# Altium PCB OSSI-1 Side Panel.PcbDoc
Units mil, origin at the board's own origin, x right, y up, seen from the top; angles counter-clockwise.
Board outline 3229 x 4312 mil, 2 copper layers (Top, Bottom), stack 61.811 mil thick; 52 components, 37 nets, 113 pads, 26 vias.
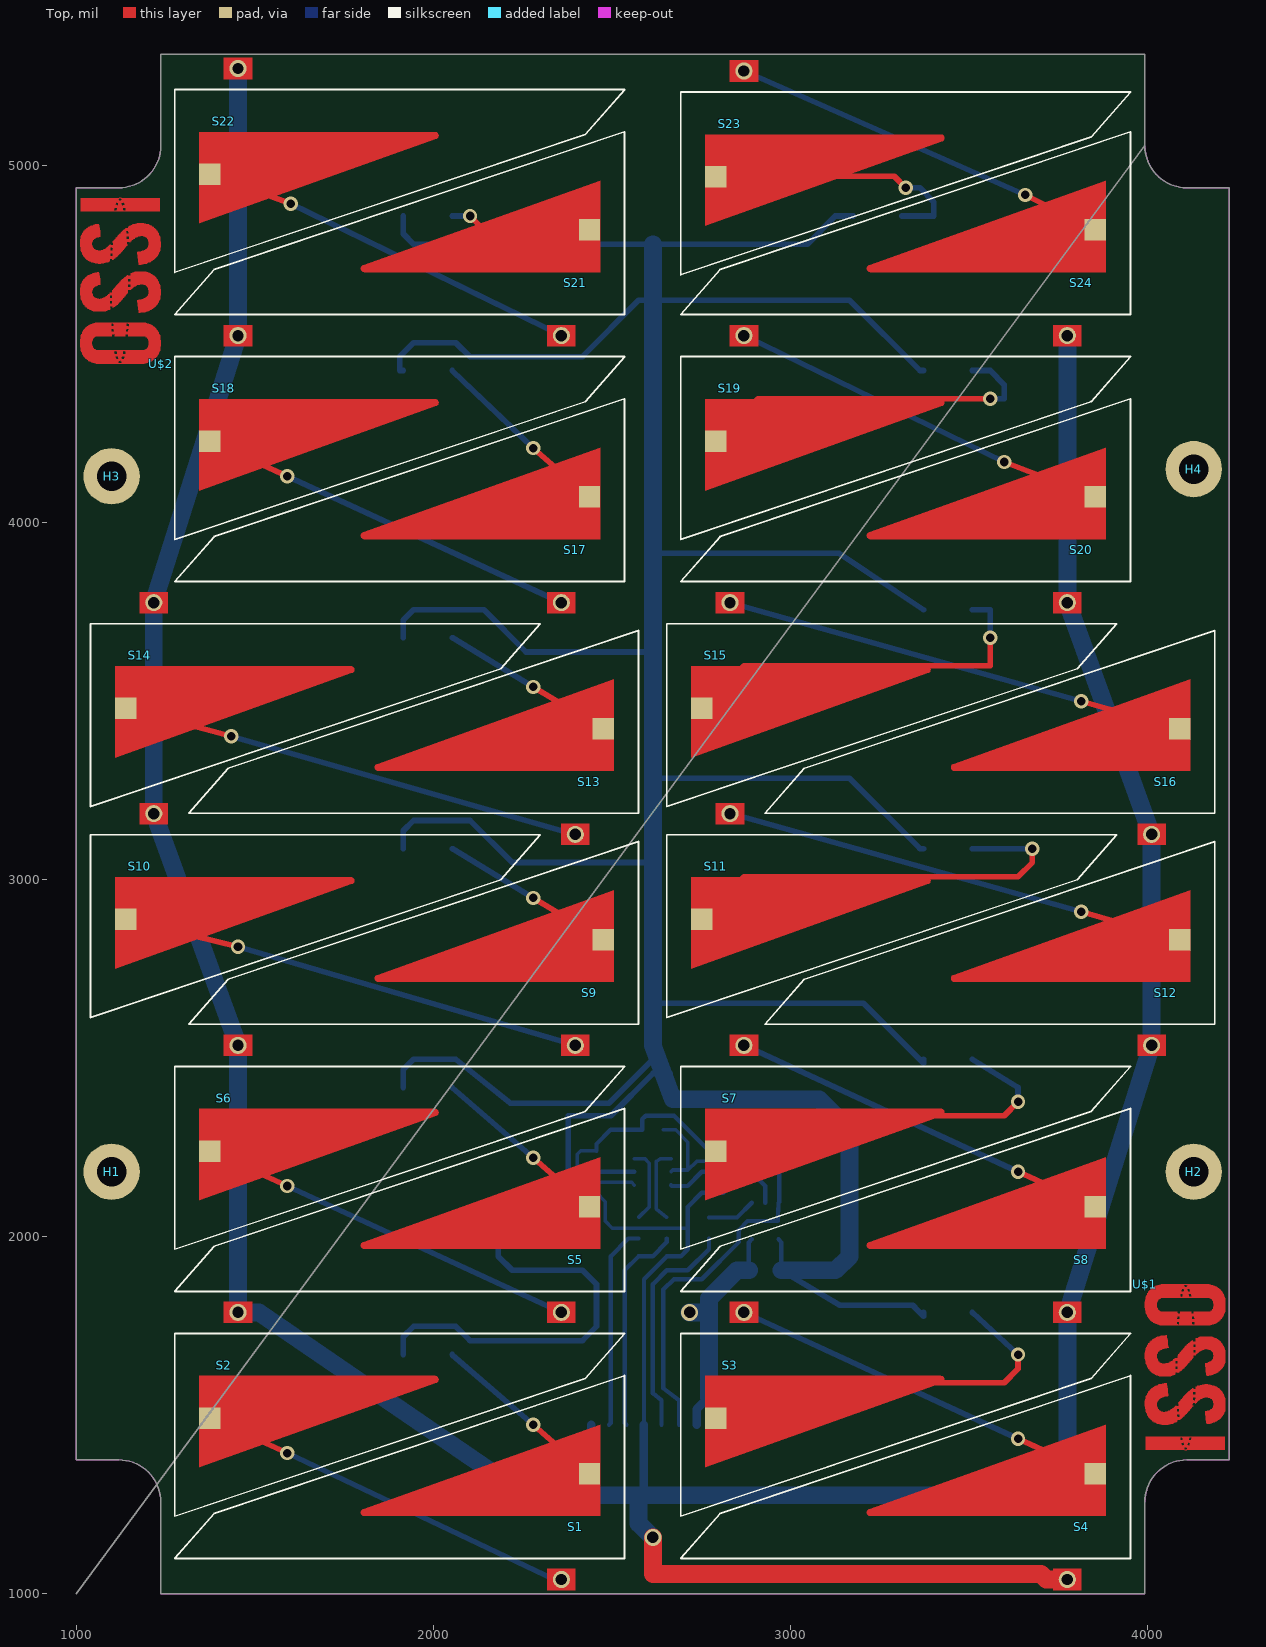
[diagram p0: Top view]
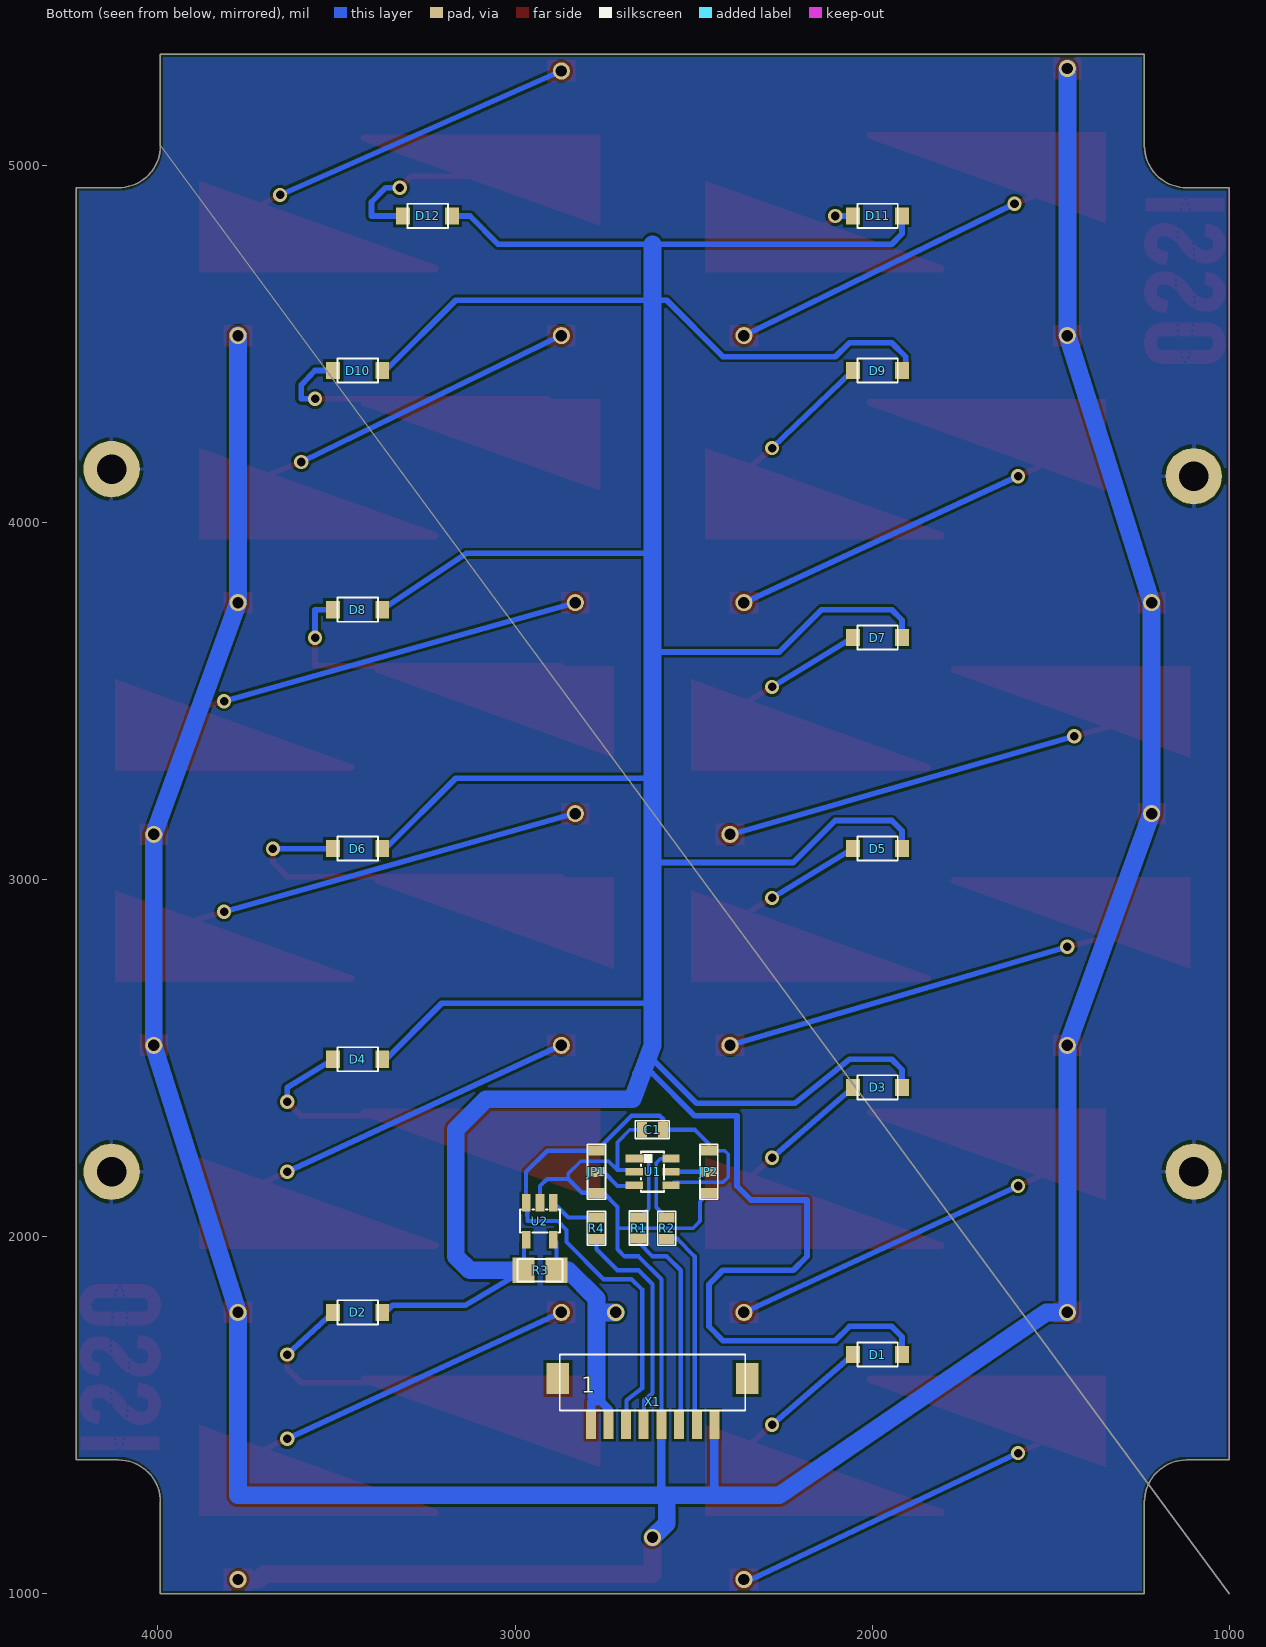
[diagram p1: Bottom view, seen from below]

## Layer stack, top to bottom
Top Solder: solder mask 0.4, Solder Resist, Dk 3.5
Top: signal copper 1.378
Dielectric 1: core 59.0551, FR-4, Dk 4.8
Bottom: signal copper 1.378
Bottom Solder: solder mask 0.4, Solder Resist, Dk 3.5

## Board outline
3993,5056 3993,5312 1237,5312 1237,5056 cw(c1119,5056) 1119,4938 1000,4938 1000,1375 1119,1375 cw(c1118.5,1256.5) 1237,1256 1237,1000 3993,1000 3993,1256 cw(c4111.5,1256.5) 4111,1375 4229,1375 4229,4938 4111,4938 cw(c4111,5056) 1000,1000

## Design rules (kind name [scope] priority, off if disabled: settings)
Clearance mdViaVia [IsVia vs IsVia] p1: gap=8
Clearance mdPadVia [IsPad vs IsVia] p2: gap=8
Clearance mdPadPad [IsPad vs IsPad] p3: gap=8
Clearance mdWireVia [(InLayerClass('Signal Layers') AND IsTrack) vs IsVia] p4: gap=8
Clearance mdWirePad [(InLayerClass('Signal Layers') AND IsTrack) vs IsPad] p5: gap=8
Clearance mdWireWire [(InLayerClass('Signal Layers') AND IsTrack) vs (InLayerClass('Signal Layers') AND IsTrack)] p6: gap=8
Clearance [All] p7: gap=8
HoleSize [All] p1: absolutevalues=TRUE maxlimit=100000 minlimit=24 maxpercent=80.000 minpercent=20.000
HoleToHoleClearance [All] p1: gap=8 allowstackedmicrovias=TRUE
PolygonConnect ThermalVias [IsVia] p1: connectstyle=Direct reliefconductorwidth=10 reliefentries=4 polygonreliefangle="90 Angle" airgapwidth=10
PolygonConnect [All] p2: connectstyle=Relief reliefconductorwidth=10 reliefentries=4 polygonreliefangle="90 Angle" airgapwidth=10
RoutingVias [All] p1: holewidth=28 width=50 viastyle="Through Hole" minholewidth=28 minwidth=50 maxholewidth=28 maxwidth=50
SilkToSilkClearance [All] p1 off: silktosilkclearance=10
SilkToSolderMaskClearance [IsPad] p1 off: minsilkscreentomaskgap=10 clearancetoexposedcopper=TRUE
SolderMaskExpansion [All] p1: expansion=4
Width [All] p1: maxlimit=100000 minlimit=10 preferedwidth=10
26 further rules are at their usual default settings.

## Components (designator, comment, footprint, x,y, rotation, side; value= is the part's Value field where it differs from the comment)
C1 "100nF" C0603(1608) 2615,2300 r0 bottom
D1 "STPS0520Z" SOD-123 1985,1670 r180 bottom
D2 "STPS0520Z" SOD-123 3441,1788 r180 bottom
D3 "STPS0520Z" SOD-123 1985,2418 r180 bottom
D4 "STPS0520Z" SOD-123 3441,2497 r180 bottom
D5 "STPS0520Z" SOD-123 1985,3087 r180 bottom
D6 "STPS0520Z" SOD-123 3441,3087 r180 bottom
D7 "STPS0520Z" SOD-123 1985,3678 r180 bottom
D8 "STPS0520Z" SOD-123 3441,3756 r180 bottom
D9 "STPS0520Z" SOD-123 1985,4426 r180 bottom
D10 "STPS0520Z" SOD-123 3441,4426 r180 bottom
D11 "STPS0520Z" SOD-123 1985,4859 r180 bottom
D12 "STPS0520Z" SOD-123 3245,4859 r180 bottom
H1 "" 2.1-PAD-ROUND 1099,2182 r0 top
H2 "" 2.1-PAD-ROUND 4130,2182 r0 top
H3 "" 2.1-PAD-ROUND 1099,4130 r0 top
H4 "" 2.1-PAD-ROUND 4130,4150 r0 top
JP1 "" JP2SMD0603 2772,2182 r270 bottom
JP2 "" JP2SMD0603 2457,2182 r90 bottom
R1 "250" R0603(1608) 2654,2024 r90 bottom
R2 "250" R0603(1608) 2575,2024 r270 bottom
R3 "50m" WSL1206 2930,1906 r180 bottom
R4 "1k" R0603(1608) 2772,2024 r270 bottom
S1 "TASCSOLARCELL" TASCSOLARCELL 2536,1099 r0 top
S2 "TASCSOLARCELL" TASCSOLARCELL 1276,1729 r180 top
S3 "TASCSOLARCELL" TASCSOLARCELL 2693,1729 r180 top
S4 "TASCSOLARCELL" TASCSOLARCELL 3953,1099 r0 top
S5 "TASCSOLARCELL" TASCSOLARCELL 2536,1847 r0 top
S6 "TASCSOLARCELL" TASCSOLARCELL 1276,2477 r180 top
S7 "TASCSOLARCELL" TASCSOLARCELL 2693,2477 r180 top
S8 "TASCSOLARCELL" TASCSOLARCELL 3953,1847 r0 top
S9 "TASCSOLARCELL" TASCSOLARCELL 2575,2595 r0 top
S10 "TASCSOLARCELL" TASCSOLARCELL 1040,3126 r180 top
S11 "TASCSOLARCELL" TASCSOLARCELL 2654,3126 r180 top
S12 "TASCSOLARCELL" TASCSOLARCELL 4189,2595 r0 top
S13 "TASCSOLARCELL" TASCSOLARCELL 2575,3186 r0 top
S14 "TASCSOLARCELL" TASCSOLARCELL 1040,3717 r180 top
S15 "TASCSOLARCELL" TASCSOLARCELL 2654,3717 r180 top
S16 "TASCSOLARCELL" TASCSOLARCELL 4189,3186 r0 top
S17 "TASCSOLARCELL" TASCSOLARCELL 2536,3835 r0 top
S18 "TASCSOLARCELL" TASCSOLARCELL 1276,4465 r180 top
S19 "TASCSOLARCELL" TASCSOLARCELL 2693,4465 r180 top
S20 "TASCSOLARCELL" TASCSOLARCELL 3953,3835 r0 top
S21 "TASCSOLARCELL" TASCSOLARCELL 2536,4583 r0 top
S22 "TASCSOLARCELL" TASCSOLARCELL 1276,5213 r180 top
S23 "TASCSOLARCELL" TASCSOLARCELL 2693,5206 r180 top
S24 "TASCSOLARCELL" TASCSOLARCELL 3953,4583 r0 top
U1 "TMP100" SOT23-6DBV 2615,2182 r270 bottom
U2 "MAX4376" SOT23-5DBV 2930,2044 r0 bottom
U$1 "" OSSILOGORECT1005 3993,1867 r270 top
U$2 "" OSSILOGORECT1005 1237,4445 r90 top
X1 "DF13DF13A-8P-1.25H" DF13A-8P 2615,1473 r180 bottom

## Footprints (in the part's own frame and the unit in brackets; to place one, negate y for a bottom-side part, rotate by r counter-clockwise, add the part's x,y. Pads: shape width x height; smd on the part's side, far side on the other; paste and mask are expansions set on the pad)
2.1-PAD-ROUND [mil] "2.1-PAD-ROUND"
  round 158 hole 83: B3,2(0,0)
C0603(1608) [mil] "C0603(1608)"
  rect 28x44 smd: 1(-29.53,0) 2(30,0)
  silkscreen extent -47,-25 48,25
DF13A-8P [mil] "DF13A-8P"
  rect 28x79 smd: 1(-172.24,0) 2(-123.03,0) 3(-73.82,0) 4(-24.61,0) 5(25,0) 6(74,0) 7(124,0) 8(173,0)
  rect 63x87 smd: P$1(-264.76,130) P$2(265,130)
  silkscreen extent -260,40 260,197
JP2SMD0603 [mil] "JP2SMD0603"
  rect 28x44 smd: 1(-59.06,0) 2(0,0) 3(60,0)
  silkscreen extent -77,-25 77,25
OSSILOGORECT1005 [mil] "OSSILOGORECT1005"
  Top drawing of 1356 lines, arcs and shapes, not listed
R0603(1608) [mil] "R0603(1608)"
  rect 28x44 smd: 1(-29.53,0) 2(30,0)
  silkscreen extent -47,-25 48,25
SOD-123 [mil] "SOD-123"
  rect 39x48 smd: A(-68.31,0) C(69,0)
  silkscreen extent -56,-33 57,34
SOT23-5DBV [mil] "SOT23-5DBV"
  rect 24x49 smd: 1(-37.4,-51.18) 2(0,-51.18) 3(38,-51.18) 4(38,52) 5(-37.4,52)
  silkscreen extent -56,-32 56,32
SOT23-6DBV [mil] "SOT23-6DBV"
  rect 22x48 smd: 1(-37.4,-51.18) 2(0,-51.18) 3(38,-51.18) 4(38,52) 5(0,52) 6(-37.4,52)
  silkscreen extent -56,-32 56,32
TASCSOLARCELL [mil] "TASCSOLARCELL"
  round 48 hole 32: N(-177.17,-59.06)
  rect 60x60 smd: P(-98.43,237)
  Top region: -216.54,-88.58 -137.8,-88.58 -137.8,-29.53 -216.54,-29.53
  Top region: -68.9,119 -729.02,119 -733.43,120.03 -736.9,122.94 -738.7,127.1 -738.43,131.62 -736.15,135.53 -732.35,138 -732.35,138 -68.9,375
  silkscreen extent -1260,0 0,512
WSL1206 [mil] "WSL1206"
  rect 62x71 smd: P$1(-45.87,0) P$2(46,0)
  silkscreen extent -63,-31 63,32

## Part data
C1: library part C0603(1608)
D1 D2 D3 D4 D5 D6 D7 D8 D9 D10 D11 D12: library part SOD-123
H1 H2 H3 H4: library part 2.1-PAD-ROUND
JP1 JP2: library part JP2SMD0603
R1 R2 R4: library part R0603(1608)
R3: library part WSL1206
U1: library part SOT23-6DBV
U2: library part SOT23-5DBV
U$1 U$2: library part OSSILOGORECT1005
X1: library part DF13A-8P

## Via types
v1: diameter 40/40 (per signal layer), hole 24, Top to Bottom, 24 vias
v2: diameter 48/48 (per signal layer), hole 32, Top to Bottom, 2 vias

## Nets (pads, with @x,y where several pads share a name; then routed paths per layer and width w, separated by ;. In a path a pad name is that pad's centre, name@x,y a point inside that pad or via, vN(x,y) a via of type N, cw(c..) or ccw(c..) an arc to the next point about the centre after c; other vN are vias at no path point)
3.3VOBC: C1.1 JP1.1 JP2.3 U1.4 U2.3 X1.3 | length 1897.7
  Bottom w10: JP2.3@2457,2241 2413,2241 2403,2231 2403,2167 2418,2152 2556,2152 U1.4
  Bottom w12: JP2.3@2457,2241 2457,2260 2497,2300 2585,2300 2585,2329 2595,2339 2674,2339 2772,2241 2910,2241 2969,2182 2969,2097 2967,2095 2965,2044 2880,2044 2856,2019 2856,1985 2752,1881 2674,1881 2644,1852 2644,1576 2688,1542 X1.3@2688,1473
CS: R4.2 X1.4 | length 632.8
  Bottom w12: X1.4@2639,1473 2639,1542 2615,1562 2615,1867 2654,1906 2713,1906 2772,1965 R4.2@2772,1995
GND: C1.2 JP1.3 JP2.1 S2.N S4.N S6.N S8.N S10.N S12.N S14.N S16.N S18.N S20.N S22.N S24.N U1.2 U2.2 X1.5 X1.8 | length 12886
  Top w50: v2(2615,1158) 2615,1055 3702,1055 3717,1040 S4.N@3776,1040
  Bottom w10: JP2.1@2457,2123 2482,2098 2482,2044 2501,2024 2713,2024 ; C1.2@2644,2300 2679,2300 2713,2265 2713,2187 ; U1.2@2666,2182 2671,2187 2713,2187 ; 2851,2162 2851,2177 2816,2211 2738,2211 2713,2187
  Bottom w12: X1.5 2590,1517 2590,1881 2654,1945 2693,1945 2713,1965 2713,2024 2713,2083 2752,2123 2772,2123 2812,2123 2851,2162 2910,2162 2930,2142 U2.2@2930,2095
  Bottom w24: X1.8 2442,1291 2457,1276 ; 2575,1276 2590,1291 X1.5
  Bottom w50: S22.N@1453,5272 1453,4524 1217,3776 1217,3186 1453,2536 1453,1788 1512,1788 2260,1276 2457,1276 2575,1276 ; v2(2615,1158) 2575,1197 2575,1276 ; S24.N@3776,4524 3776,3776 4012,3126 4012,2536 3776,1788 3776,1276 2575,1276
N$1: S1.N S2.P | length 1085.1
  Top w16: S2.P@1375,1493 v1(1591,1394)
  Bottom w16: v1(1591,1394) 2339,1040 S1.N@2359,1040
N$2: D1.A S1.P | length 510.3
  Top w16: v1(2280,1473) S1.P@2438,1335
  Bottom w16: D1.A@2053,1670 v1(2280,1473)
N$3: S3.N S4.P | length 1083.3
  Top w16: v1(3638,1434) S4.P@3855,1335
  Bottom w16: S3.N@2871,1788 v1(3638,1434)
N$4: D2.A S3.P | length 1116.8
  Top w16: S3.P@2792,1493 2890,1591 3599,1591 3638,1630 v1(3638,1670)
  Bottom w16: D2.A@3510,1788 v1(3638,1670)
N$5: S5.N S6.P | length 1083.3
  Top w16: S6.P@1375,2241 v1(1591,2142)
  Bottom w16: v1(1591,2142) S5.N@2359,1788
N$6: D3.A S5.P | length 510.3
  Top w16: v1(2280,2221) S5.P@2438,2083
  Bottom w16: D3.A@2053,2418 v1(2280,2221)
N$7: S7.N S8.P | length 1083.3
  Top w16: v1(3638,2182) S8.P@3855,2083
  Bottom w16: S7.N@2871,2536 v1(3638,2182)
N$8: D4.A S7.P | length 1093.2
  Top w16: S7.P@2792,2241 2890,2339 3599,2339 v1(3638,2378)
  Bottom w16: D4.A@3510,2497 3638,2418 v1(3638,2378)
N$9: S9.N S10.P | length 1309
  Top w16: S10.P@1138,2890 v1(1453,2812)
  Bottom w16: v1(1453,2812) S9.N@2398,2536
N$10: D5.A S9.P | length 495.3
  Top w16: v1(2280,2949) S9.P@2477,2831
  Bottom w16: D5.A@2053,3087 v1(2280,2949)
N$11: S11.N S12.P | length 1309.1
  Top w16: v1(3815,2910) S12.P@4091,2831
  Bottom w16: S11.N@2831,3186 v1(3815,2910)
N$12: D6.A S11.P | length 1198.2
  Top w16: S11.P@2752,2890 2871,3008 3638,3008 3678,3048 v1(3678,3087)
  Bottom w16: D6.A@3510,3087 v1(3678,3087)
N$13: S13.N S14.P | length 1309.1
  Top w16: S14.P@1138,3481 v1(1434,3402)
  Bottom w16: v1(1434,3402) S13.N@2398,3126
N$14: D7.A S13.P | length 495.3
  Top w16: v1(2280,3540) S13.P@2477,3422
  Bottom w16: D7.A@2053,3678 v1(2280,3540)
N$15: S15.N S16.P | length 1308.8
  Top w16: v1(3815,3500) S16.P@4091,3422
  Bottom w16: S15.N@2831,3776 v1(3815,3500)
N$16: D8.A S15.P | length 1063.6
  Top w16: S15.P@2752,3481 2871,3599 3560,3599 v1(3560,3678)
  Bottom w16: D8.A@3510,3756 3560,3756 v1(3560,3678)
N$17: S17.N S18.P | length 1083.3
  Top w16: S18.P@1375,4229 v1(1591,4130)
  Bottom w16: v1(1591,4130) S17.N@2359,3776
N$18: D9.A S17.P | length 523.8
  Top w16: v1(2280,4209) S17.P@2438,4071
  Bottom w16: D9.A@2053,4426 v1(2280,4209)
N$19: S19.N S20.P | length 1084
  Top w16: v1(3599,4170) S20.P@3855,4071
  Bottom w16: S19.N@2871,4524 v1(3599,4170)
N$20: D10.A S19.P | length 1000.7
  Top w16: S19.P@2792,4229 2910,4347 v1(3560,4347)
  Bottom w16: D10.A@3510,4426 3560,4426 3599,4386 3599,4347 v1(3560,4347)
N$21: S21.N S22.P | length 1084.2
  Top w16: S22.P@1375,4977 v1(1601,4893)
  Bottom w16: v1(1601,4893) S21.N@2359,4524
N$22: D11.A S21.P | length 401.9
  Top w16: v1(2103,4859) 2142,4819 S21.P@2438,4819
  Bottom w16: D11.A@2053,4859 v1(2103,4859)
N$23: S23.N S24.P | length 1080.6
  Top w16: v1(3658,4918) S24.P@3855,4819
  Bottom w16: S23.N@2871,5265 v1(3658,4918)
N$24: D12.A S23.P | length 768.1
  Top w16: S23.P@2792,4970 3291,4970 v1(3323,4938)
  Bottom w16: D12.A@3313,4859 3402,4859 3402,4898 3363,4938 v1(3323,4938)
N$25: R1.2 U1.1 | length 214.1
  Bottom w10: R1.2 2625,2078 2625,2211 2637,2219 U1.1@2666,2219
N$26: R2.1 U1.6 | length 212.1
  Bottom w10: U1.6@2563,2219 2592,2219 2605,2206 2605,2083 R2.1@2575,2054
N$27: D1.C D2.C D3.C D4.C D5.C D6.C D7.C D8.C D9.C D10.C D11.C D12.C R3.P$1 U2.4 | length 14120
  Bottom w12: U2.4@2967,1993 2975,1984 R3.P$1@2975,1906
  Bottom w16: D1.C 1916,1720 1945,1749 2063,1749 2103,1709 2418,1709 2457,1749 2457,1867 2418,1906 2221,1906 2182,1945 2182,2103 2339,2103 2378,2142 2378,2339 2497,2339 2615,2457 2664,2457 2671,2385 ; D3.C 1916,2468 1945,2497 2063,2497 2216,2374 2492,2374 2615,2497 2615,2536 ; D5.C 1916,3137 1945,3166 2103,3166 2221,3048 2615,3048 ; D7.C 1916,3727 1945,3756 2142,3756 2260,3638 2615,3638 ; D9.C 1906,4426 1906,4465 1945,4504 2063,4504 2103,4465 2418,4465 2575,4623 2615,4623 3166,4623 3363,4426 D10.C@3373,4426 ; D11.C 1916,4809 1945,4780 2615,4780 3048,4780 3126,4859 D12.C ; 2615,2654 3205,2654 3373,2486 D4.C@3373,2497 ; 2615,3284 3166,3284 3363,3087 D6.C@3373,3087 ; 2615,3914 3137,3914 D8.C@3373,3756 ; R3.P$1@2975,1906 3140,1808 3343,1808 3373,1777 D2.C@3373,1788
  Bottom w50: 2615,4780 2615,4623 2615,3914 2615,3638 2615,3284 2615,3048 2615,2654 2615,2536 2671,2385 3081,2385 3166,2300 3166,1945 3126,1906 R3.P$1@2975,1906
N$28: JP1.2 U1.3 | length 123.7
  Bottom w12: U1.3@2666,2144 2668,2142 2713,2142 2752,2182 JP1.2
N$29: JP2.2 U1.5 | length 106
  Bottom w12: JP2.2 U1.5
N$30: R4.1 U2.1 | length 137
  Bottom w12: R4.1@2772,2054 2851,2054 U2.1@2892,2095
PANELTEMP_SCL: R1.1 X1.6 | length 596.1
  Bottom w12: X1.6 2536,1478 2536,1906 2575,1945 2615,1945 2654,1985 R1.1@2654,1995
PANELTEMP_SDA: R2.2 X1.7 | length 573.1
  Bottom w12: X1.7@2492,1473 2497,1478 2497,1945 2546,1995 R2.2@2575,1995
STRUT_GND: H1.B3,2 H2.B3,2 H3.B3,2 H4.B3,2
VSOLAR: R3.P$2 U2.5 X1.1 X1.2 | length 741.8
  Bottom w12: R3.P$2 2884,1984 U2.5@2892,1993
  Bottom w24: X1.2 2738,1517 2772,1552 2787,1537 X1.1@2787,1473
  Bottom w50: v2(2718,1788) 2772,1788 ; 2772,1552 2772,1788 ; R3.P$2 2851,1906 2772,1827 2772,1788
pads on no net: X1.P$1 X1.P$2

## Polygon pours and split planes (outlines as drawn)
STRUT_GND on Bottom "Bottom-STRUT_GND" (solid, remove dead copper, pour order 2): 1005.01,5317 4244.01,5317 4233.99,995 994.99,995

## Keep-outs
Keep-Out Layer:
  lines w0: 1000,1375 1000,4938 1119,4938 ccw(c1119,5056) 1237,5056 1237,5312 3993,5312 3993,5056 ccw(c4111,5056) 4111,4938 4229,4938 4229,1375 4111,1375 ccw(c4111.5,1256.5) 3993,1256 3993,1000 1237,1000 1237,1256 ccw(c1118.5,1256.5) 1119,1375 1000,1375

## Silkscreen, mask and mechanical layers (free items; w line width, h text height)
Dimension:
  lines w0: 1000,1375 1000,4938 1119,4938 ccw(c1119,5056) 1237,5056 1237,5312 3993,5312 3993,5056 ccw(c4111,5056) 4111,4938 4229,4938 4229,1375 4111,1375 ccw(c4111.5,1256.5) 3993,1256 3993,1000 1237,1000 1237,1256 ccw(c1118.5,1256.5) 1119,1375 1000,1375

## Text inside footprints (layer, text, board x,y; h text height)
C1: bNames ">NAME" at 2580,2265 h77.5 r180; bValues ">VALUE" at 2580,2380 h77.5 r180
D1: bNames ">NAME" at 2110,1720 h77.5; bValues ">VALUE" at 2110,1570 h77.5
D2: bNames ">NAME" at 3566,1838 h77.5; bValues ">VALUE" at 3566,1688 h77.5
D3: bNames ">NAME" at 2110,2468 h77.5; bValues ">VALUE" at 2110,2318 h77.5
D4: bNames ">NAME" at 3566,2547 h77.5; bValues ">VALUE" at 3566,2397 h77.5
D5: bNames ">NAME" at 2110,3137 h77.5; bValues ">VALUE" at 2110,2987 h77.5
D6: bNames ">NAME" at 3566,3137 h77.5; bValues ">VALUE" at 3566,2987 h77.5
D7: bNames ">NAME" at 2110,3728 h77.5; bValues ">VALUE" at 2110,3578 h77.5
D8: bNames ">NAME" at 3566,3806 h77.5; bValues ">VALUE" at 3566,3656 h77.5
D9: bNames ">NAME" at 2110,4476 h77.5; bValues ">VALUE" at 2110,4326 h77.5
D10: bNames ">NAME" at 3566,4476 h77.5; bValues ">VALUE" at 3566,4326 h77.5
D11: bNames ">NAME" at 2110,4909 h77.5; bValues ">VALUE" at 2110,4759 h77.5
D12: bNames ">NAME" at 3370,4909 h77.5; bValues ">VALUE" at 3370,4759 h77.5
JP1: bNames ">NAME" at 2797,2082 h77.5 r90
JP2: bNames ">NAME" at 2432,2282 h77.5 r270
R1: bNames ">NAME" at 2689,1989 h77.5 r270; bValues ">VALUE" at 2574,1989 h77.5 r270
R2: bNames ">NAME" at 2540,2059 h77.5 r90; bValues ">VALUE" at 2655,2059 h77.5 r90
R3: bNames ">NAME" at 3055,1956 h77.5; bValues ">VALUE" at 3080,1806 h77.5
R4: bNames ">NAME" at 2737,2059 h77.5 r90; bValues ">VALUE" at 2852,2059 h77.5 r90
S1: tNames ">NAME" at 2576,1218 h77.5; tValues ">VALUE" at 2576,1139 h77.5
S2: tNames ">NAME" at 1236,1610 h77.5 r180; tValues ">VALUE" at 1236,1689 h77.5 r180
S3: tNames ">NAME" at 2653,1610 h77.5 r180; tValues ">VALUE" at 2653,1689 h77.5 r180
S4: tNames ">NAME" at 3993,1218 h77.5; tValues ">VALUE" at 3993,1139 h77.5
S5: tNames ">NAME" at 2576,1966 h77.5; tValues ">VALUE" at 2576,1887 h77.5
S6: tNames ">NAME" at 1236,2358 h77.5 r180; tValues ">VALUE" at 1236,2437 h77.5 r180
S7: tNames ">NAME" at 2653,2358 h77.5 r180; tValues ">VALUE" at 2653,2437 h77.5 r180
S8: tNames ">NAME" at 3993,1966 h77.5; tValues ">VALUE" at 3993,1887 h77.5
S9: tNames ">NAME" at 2615,2714 h77.5; tValues ">VALUE" at 2615,2635 h77.5
S10: tNames ">NAME" at 1000,3007 h77.5 r180; tValues ">VALUE" at 1000,3086 h77.5 r180
S11: tNames ">NAME" at 2614,3007 h77.5 r180; tValues ">VALUE" at 2614,3086 h77.5 r180
S12: tNames ">NAME" at 4229,2714 h77.5; tValues ">VALUE" at 4229,2635 h77.5
S13: tNames ">NAME" at 2615,3305 h77.5; tValues ">VALUE" at 2615,3226 h77.5
S14: tNames ">NAME" at 1000,3598 h77.5 r180; tValues ">VALUE" at 1000,3677 h77.5 r180
S15: tNames ">NAME" at 2614,3598 h77.5 r180; tValues ">VALUE" at 2614,3677 h77.5 r180
S16: tNames ">NAME" at 4229,3305 h77.5; tValues ">VALUE" at 4229,3226 h77.5
S17: tNames ">NAME" at 2576,3954 h77.5; tValues ">VALUE" at 2576,3875 h77.5
S18: tNames ">NAME" at 1236,4346 h77.5 r180; tValues ">VALUE" at 1236,4425 h77.5 r180
S19: tNames ">NAME" at 2653,4346 h77.5 r180; tValues ">VALUE" at 2653,4425 h77.5 r180
S20: tNames ">NAME" at 3993,3954 h77.5; tValues ">VALUE" at 3993,3875 h77.5
S21: tNames ">NAME" at 2576,4702 h77.5; tValues ">VALUE" at 2576,4623 h77.5
S22: tNames ">NAME" at 1236,5094 h77.5 r180; tValues ">VALUE" at 1236,5173 h77.5 r180
S23: tNames ">NAME" at 2653,5087 h77.5 r180; tValues ">VALUE" at 2653,5166 h77.5 r180
S24: tNames ">NAME" at 3993,4702 h77.5; tValues ">VALUE" at 3993,4623 h77.5
U1: bNames ">NAME" at 2540,2257 h77.5 r90; bValues ">VALUE" at 2750,2257 h77.5 r90
U2: bNames ">NAME" at 2855,1969 h77.5 r180; bValues ">VALUE" at 2855,2179 h77.5 r180
X1: bNames ">NAME" at 2851.22,1749 h77.5; bValues ">VALUE" at 2851.22,1695 h77.5; Bottom Overlay "1" at 2815,1548 h77.5